# EAGLE board RGB_LED_Controller (EAGLE 6.1)
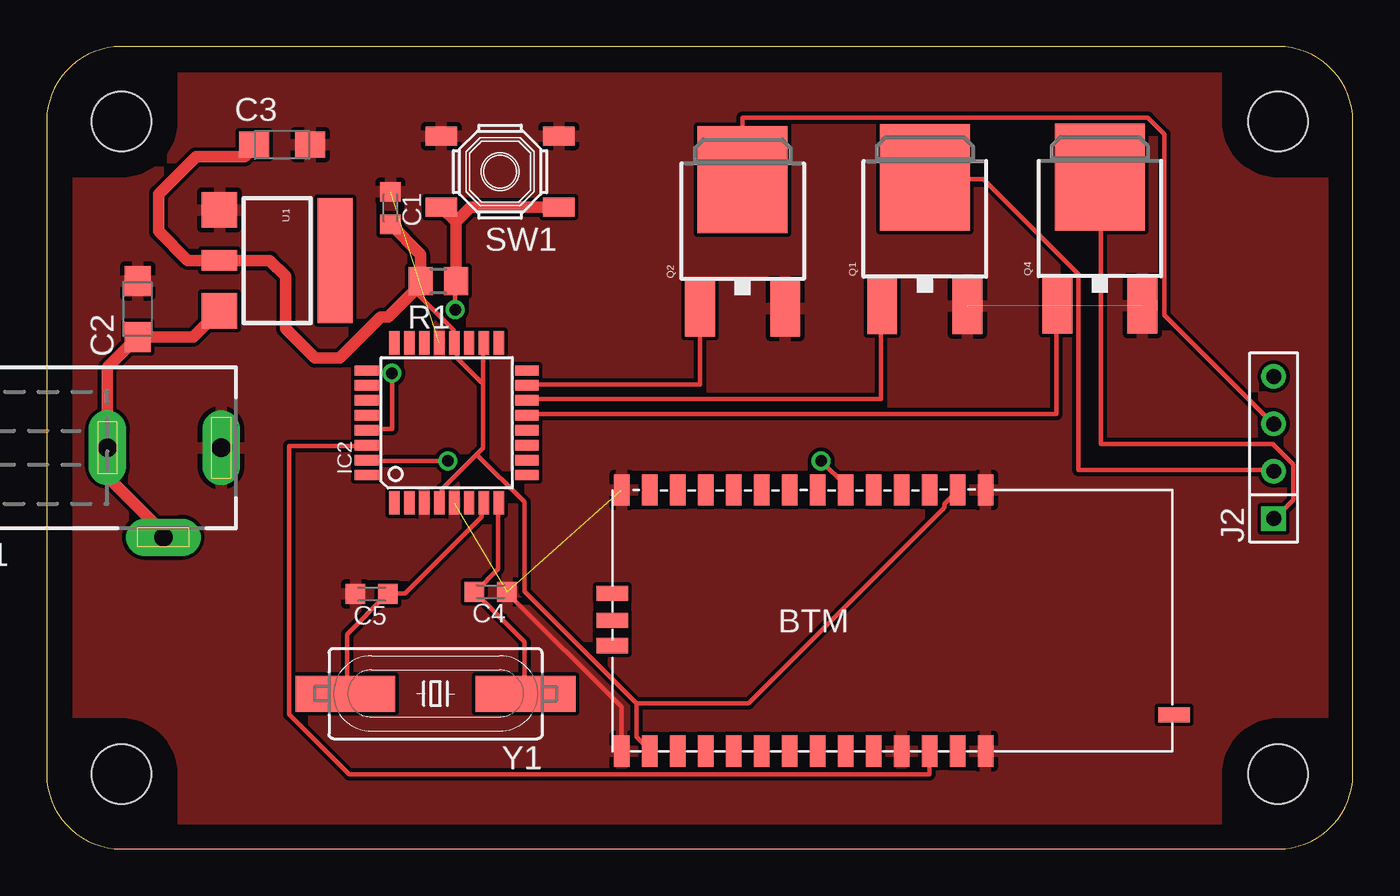
[diagram p0: board, top side]
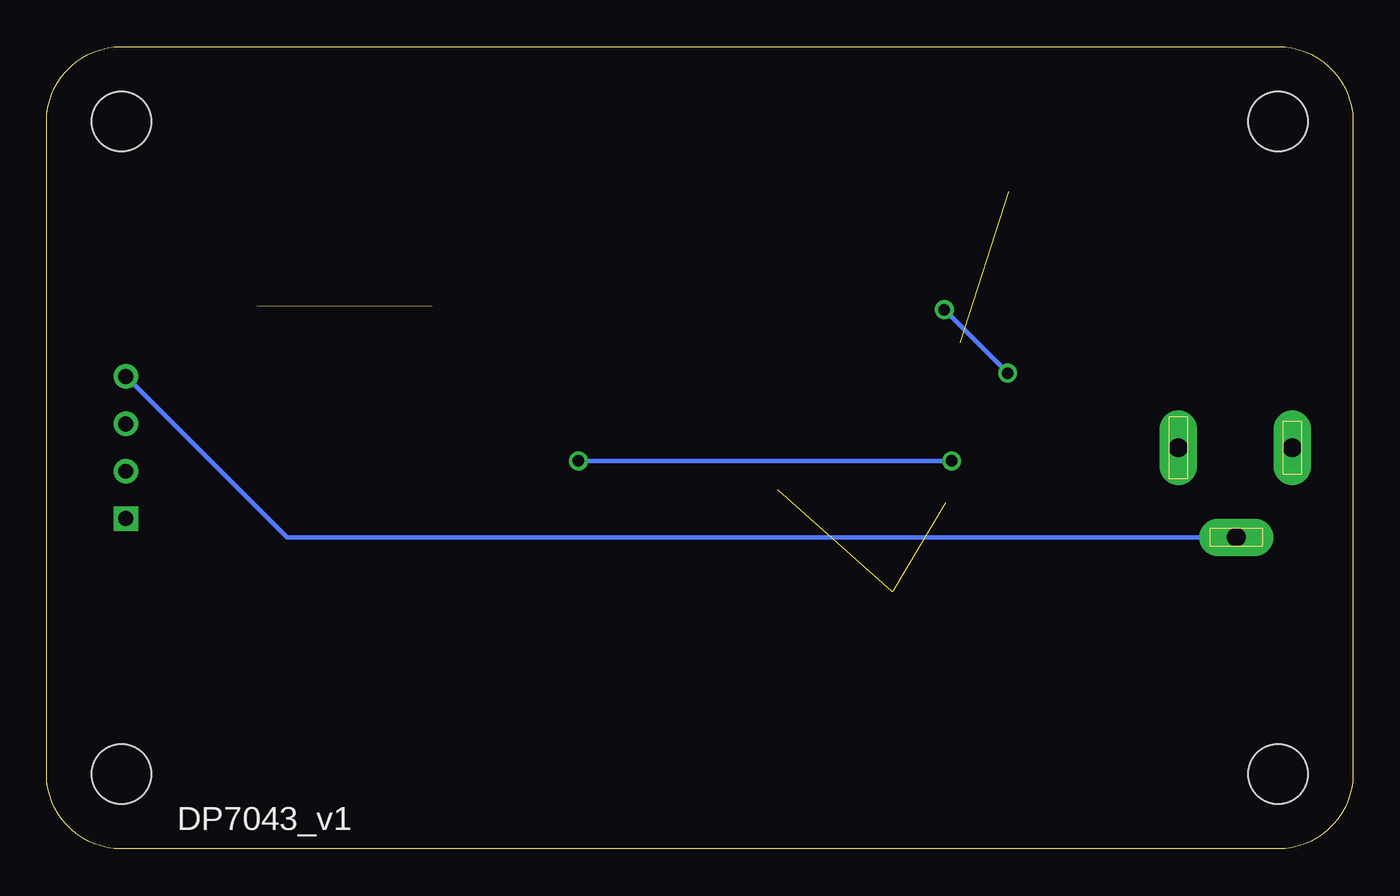
[diagram p1: board, bottom side, seen from below]

Size 70 x 43 mm. Coordinates in mm from the lower left corner, seen from the top.
Copper layers (1*16): Top 0.035mm / dielectric 1.5mm / Bottom 0.035mm
Design rules: minimum track width 10mil, minimum drill 24mil, track to track 8mil, track to pad 8mil, pad to pad 8mil, via to via 8mil, smd to smd 8mil, copper to edge 40mil, drill to drill 8mil, minimum pad ring 10mil, minimum via ring 8mil, stop-mask expansion 4mil, vias tented up to drill 0mil, thermal gap 10mil

## Footprints (pad centres in the part's own frame; a part is rotated, then mirrored left to right if it is on the bottom)
C0603K = smd 1.05 x 1.08: 1 -0.875,0; 2 0.875,0
SMC_A = smd 1.6 x 1.4: + -1.5,0; - 1.5,0
TQFP32-08 = smd 1.27 x 0.559: 1 -4.293,2.8; 2 -4.293,2; 3 -4.293,1.2; 4 -4.293,0.4; 5 -4.293,-0.4; 6 -4.293,-1.2; 7 -4.293,-2; 8 -4.293,-2.8; 17 4.293,-2.8; 18 4.293,-2; 19 4.293,-1.2; 20 4.293,-0.4; 21 4.293,0.4; 22 4.293,1.2; 23 4.293,2; 24 4.293,2.8 | smd 0.559 x 1.27: 9 -2.8,-4.293; 10 -2,-4.293; 11 -1.2,-4.293; 12 -0.4,-4.293; 13 0.4,-4.293; 14 1.2,-4.293; 15 2,-4.293; 16 2.8,-4.293; 25 2.8,4.293; 26 2,4.293; 27 1.2,4.293; 28 0.4,4.293; 29 -0.4,4.293; 30 -1.2,4.293; 31 -2,4.293; 32 -2.8,4.293
DCJ0303 = drill 1 pad 2 long: 1 0,3.1; 2 4.8,0; 3 0,-3
M1X4 = drill 0.8 square: 1 0,0 | drill 0.8: 2 2.54,0; 3 5.08,0; 4 7.62,0
DPAK = smd 1.6 x 3: 1 -2.28,-5.31; 3 2.28,-5.31 | smd 4.826 x 5.715: 4 0,1.588
R0805 = smd 1.3 x 1.5: 1 -0.95,0; 2 0.95,0
SW_TACT_SMALL = smd 1.7 x 1: 1 -3.15,1.9; 2 3.15,1.9; 3 -3.15,-1.9; 4 3.15,-1.9
SOT223-W = smd 1.9 x 1.9: 1 -2.7,-3.1; 3 2.7,-3.1 | smd 1.1 x 1.9: 2 0,-3.1 | smd 6.7 x 1.9: 4 0,3.1
DP7043_V1 = hole 3.2: 4,4; 66,4; 66,39; 4,39
BT-MODULE = smd 0.813 x 1.676: 3V3 18.5,14; 3V32 2,0; GND 20,14; GND2 0.5,14; GND3 0.5,0; GND4 20,0; MISO 12.5,0; MOSI 14,0; NC 18.5,0; NCSB 9.5,0; NCTS 6.5,14; NRTS 14,14; PCMC 3.5,14; PCMI 5,14; PCMO 11,14; PCMS 2,14; PIO2 17,14; PIO3 15.5,14; PIO4 8,0; PIO5 15.5,0; PIO6 5,0; PIO7 6.5,0; RES 3.5,0; RXD 12.5,14; SCLK 11,0; TXD 17,0; USB_D+ 9.5,14; USB_D- 8,14 | smd 1.676 x 0.813: AIO0 0,8.45; AIO1 0,7; AIO2 0,5.65; RF 30.1,1.95
HC49UP = smd 5.334 x 1.93: 1 -4.826,0; 2 4.826,0

## Placement (x,y rotation side)
C1  [C0603K]  18.42,34.35 270 top
C2  10uF  [SMC_A]  4.87,28.93 90 top
C3  10uF  [SMC_A]  12.62,37.74 0 top
C4  [C0603K]  23.79,13.78 180 top
C5  [C0603K]  17.42,13.66 180 top
IC2  MEGA8-AI  [TQFP32-08]  21.44,22.84 90 top
J1  [DCJ0303]  6.25,21.5 270 top
J2  CON_HEADER_1X04  [M1X4]  65.76,17.7 90 top
Q1  MOSFET-NCHANNELFDD8580  [DPAK]  47.06,34.4 0 top
Q2  MOSFET-NCHANNELFDD8580  [DPAK]  37.3,34.28 0 top
Q4  MOSFET-NCHANNELFDD8580  [DPAK]  56.44,34.42 0 top
R1  [R0805]  20.99,30.42 180 top
SW1  [SW_TACT_SMALL]  24.3,36.3 180 top
U1  [SOT223-W]  12.36,31.54 270 top
U$1  [DP7043_V1]  0,0 0 top
U$4  AUBTM-20  [BT-MODULE]  30.32,5.24 0 top
Y1  [HC49UP]  20.84,8.32 180 top

## Library data of the parts
C1 C4 C5 R1 = rcl
C2 C3 J2 SW1 U$1 = dp_devices
IC2 = atmel; MPN: ATMEGA8-16AU; OC_FARNELL: 9171371; OC_NEWARK: 73M8863
J1 = con-jack
Q1 Q2 Q4 Y1 = SparkFun
U1 = microbuilder
U$4 = bluetooth

## Nets
12V: C2.+ J1.2 J1.3 J2.4 U1.3
+3V3: C1.2 C3.+ IC2.4 IC2.18 IC2.20 R1.2 U1.2 U$4.3V3 U$4.3V32
GND: C1.1 C2.- C3.- C4.1 C5.2 IC2.3 IC2.5 IC2.21 J1.1 Q1.3 Q2.3 Q4.3 SW1.3 SW1.4 U1.1 U$4.GND U$4.GND2 U$4.GND3 U$4.GND4 U$4.PIO5
N$1: IC2.13 Q4.1
N$2: IC2.14 Q1.1
N$3: IC2.15 Q2.1
N$4: IC2.29 R1.1 SW1.1 SW1.2
N$5: C5.1 IC2.7 Y1.2
N$6: J2.1 Q4.4
N$7: J2.2 Q1.4
N$8: J2.3 Q2.4
N$9: C4.2 IC2.8 Y1.1
RX: IC2.31 U$4.RXD
TX: IC2.30 U$4.TXD
VCC: IC2.6

## Tracks (layer width: path | path; a pad name or v marks a point on that pad's centre or on a via)
12V
  Top 0.254: 6.4,16.8 6.3,16.7 J1.2
  Top 0.61: 6.4,16.8 3.25,19.95 J1.3 3.25,25.81 C2.+ 7.85,27.43 U1.3
  Bottom 0.254: J1.2 57.1,16.7 65.7,25.3 J2.4
+3V3
  Top 0.254: 20.1,30.3 20,30.4 R1.2 19.9,29.7 21.8,27.8 21.8,27.2 IC2.20 21.9,27.1 22,27 22,26.3 23.3,25 23.4,25 | 23.05,21.15 23.4,21.5 23.4,25 | 23.05,21.15 21.2,19.3 21.2,18.7 21.1,18.6 IC2.4 | 23.4,25 23.4,27.1 IC2.18 | 31.6,7.8 31.6,6 32.3,5.3 U$4.3V32 | 31.6,7.8 25.6,13.8 25.6,18.6 23.05,21.15 | 31.6,7.8 37.6,7.8 48.1,18.3 48.1,18.5 48.8,19.2 U$4.3V3
  Top 0.61: C3.+ 11.16,37.74 11.2,37.7 10.6,37.1 8,37.1 6,35.1 6,33.1 7.56,31.54 U1.2 11.96,31.54 12.8,30.7 12.8,27.9 14.4,26.3 15.7,26.3 17.9,28.5 18.3,28.5 20.1,30.3 20.2,30.4 | C1.2 20.04,31.86 R1.2
GND  (4 unrouted)
  Top 0.254: C4.1 24.7,13.7 30.8,7.6 30.8,5.3 U$4.GND3 | 16.5,13.6 C5.2 16.5,13.6
  pour Top: 1.8,36.6 1.8,38.7 arc-90 4.4,41.3 65.6,41.3 arc-90 68.4,38.5 68.4,4.1 arc-90 65.9,1.6 4.2,1.6 arc-90 1.7,4.1 1.7,36.4 arc-90 1.8,36.5
N$1
  Top 0.254: IC2.13 25.8,23.3 54.1,23.3 54.1,29.1 Q4.1
N$2
  Top 0.254: IC2.14 25.8,24.1 44.7,24.1 44.7,29 Q1.1
N$3
  Top 0.254: IC2.15 25.8,24.9 35,24.9 35,28.9 Q2.1
N$4  (via drill 0.61)
  Top 0.254: v18.5,25.5 18.5,22.5 17.2,22.5 IC2.29 | v21.9,28.9 21.9,30.2 R1.1
  Top 0.61: SW1.2 21.94,33.61 | 21.94,33.61 R1.1 | 21.94,33.61 22.73,34.4 SW1.1
  Bottom 0.254: v21.9,28.9 v18.5,25.5
N$5
  Top 0.254: Y1.2 16.1,8.4 16.1,11.5 18.2,13.6 C5.1 18.4,13.7 19.2,13.7 23.3,17.8 23.3,18.4 23.4,18.5 IC2.7
N$6
  Top 0.254: J2.1 65.8,17.7 66.8,18.7 66.8,20.6 65.7,21.7 56.5,21.7 56.5,36 Q4.4
N$7
  Top 0.254: J2.2 65.7,20.3 55.3,20.3 55.3,30.8 50.2,35.9 47.1,35.9 Q1.4
N$8
  Top 0.254: Q2.4 37.3,39.2 59,39.2 59.9,38.3 59.9,28.6 65.7,22.8 J2.3
N$9
  Top 0.254: IC2.8 24.2,18.5 24.2,15 23,13.8 C4.2 23,13.7 25.6,11.1 25.6,8.4 Y1.1
RX  (via drill 0.61)
  Top 0.254: v21.5,20.8 17.2,20.8 IC2.31 | v41.5,20.8 42.8,19.5 42.8,19.3 U$4.RXD
  Bottom 0.254: v41.5,20.8 v21.5,20.8
TX
  Top 0.254: IC2.30 17.1,21.6 13,21.6 13,7.2 16.2,4 47.3,4 47.3,5.2 U$4.TXD

## Text on the board
Top: http://murlidharshenoy.wordpress.com/